# Altium PCB PCB4.PcbDoc
Units mm, origin at the board's own origin, x right, y up, seen from the top; angles counter-clockwise.
Board outline 90 x 120 mm, 2 copper layers (Top Layer, Bottom Layer); 37 components, 42 nets, 192 pads, 54 vias.
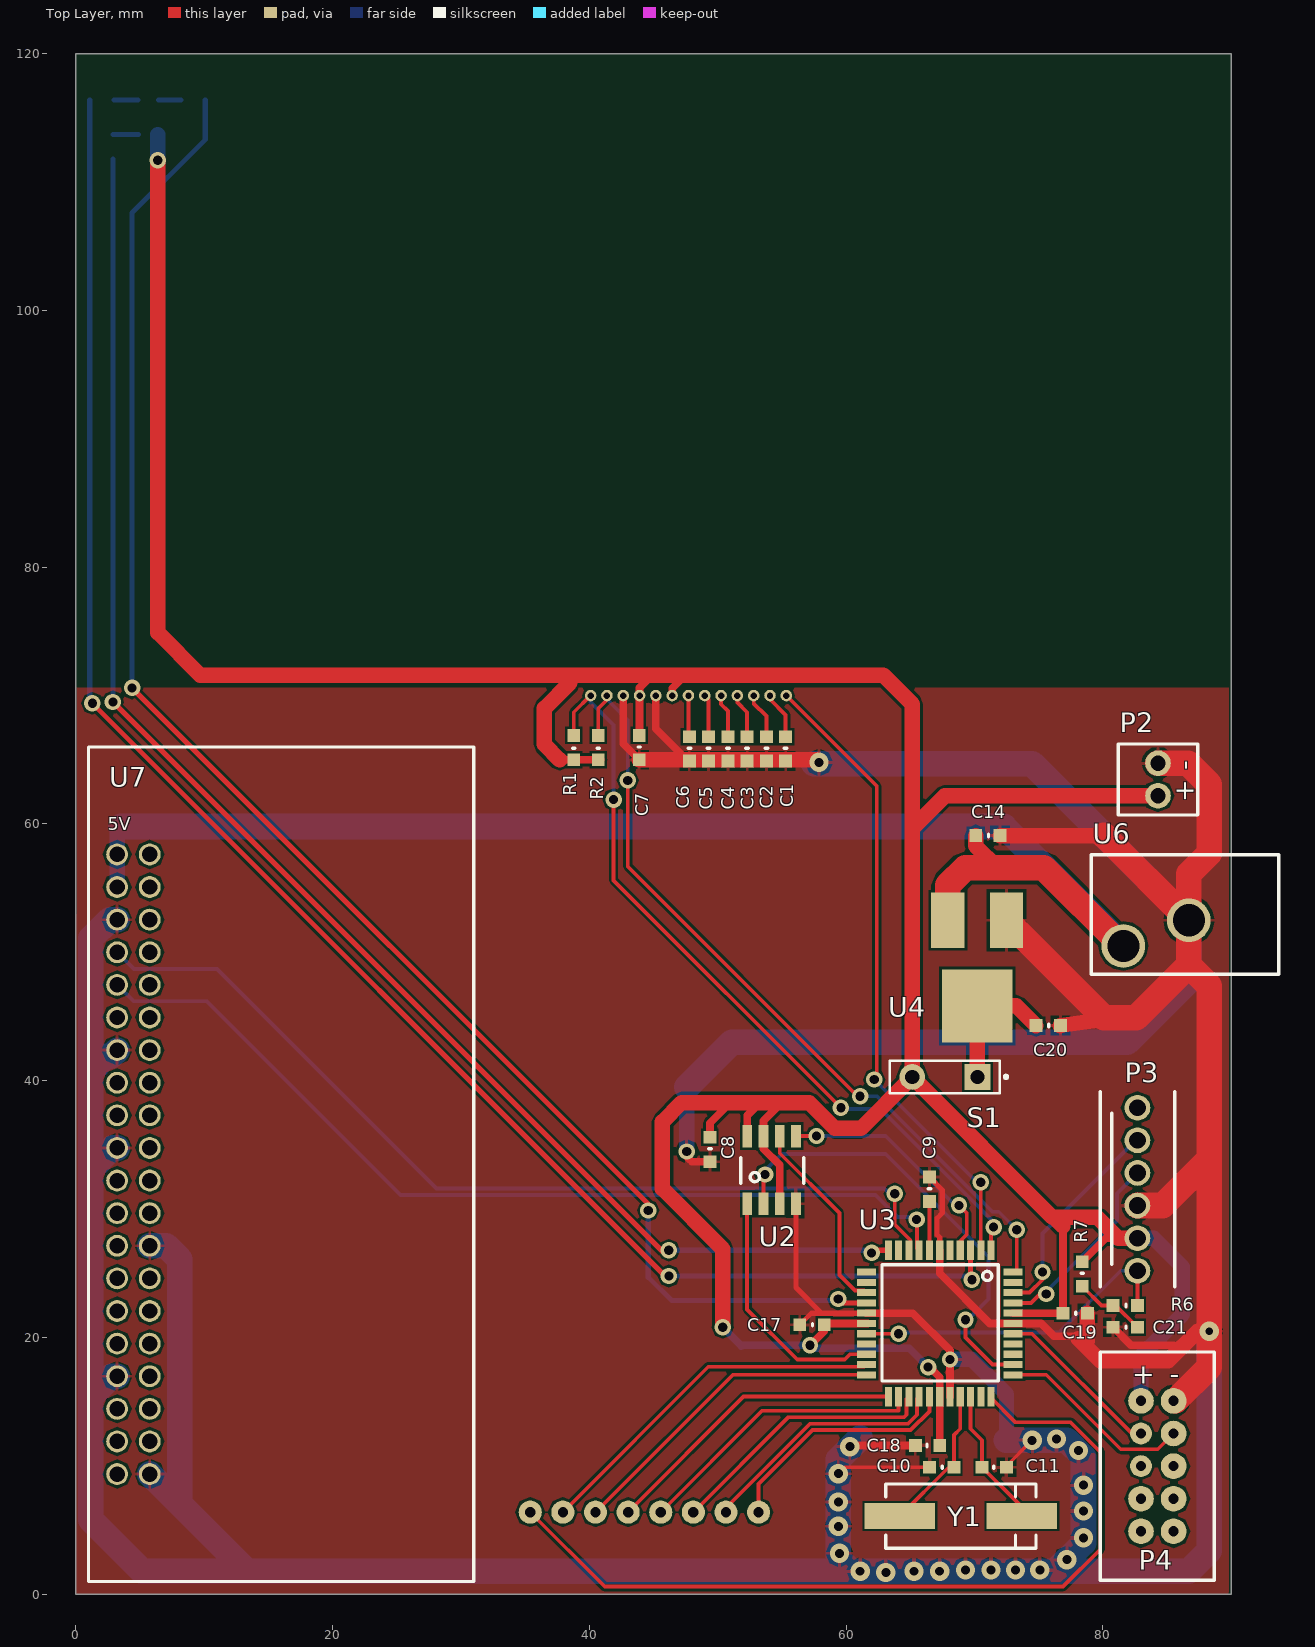
[diagram p0: Top Layer view]
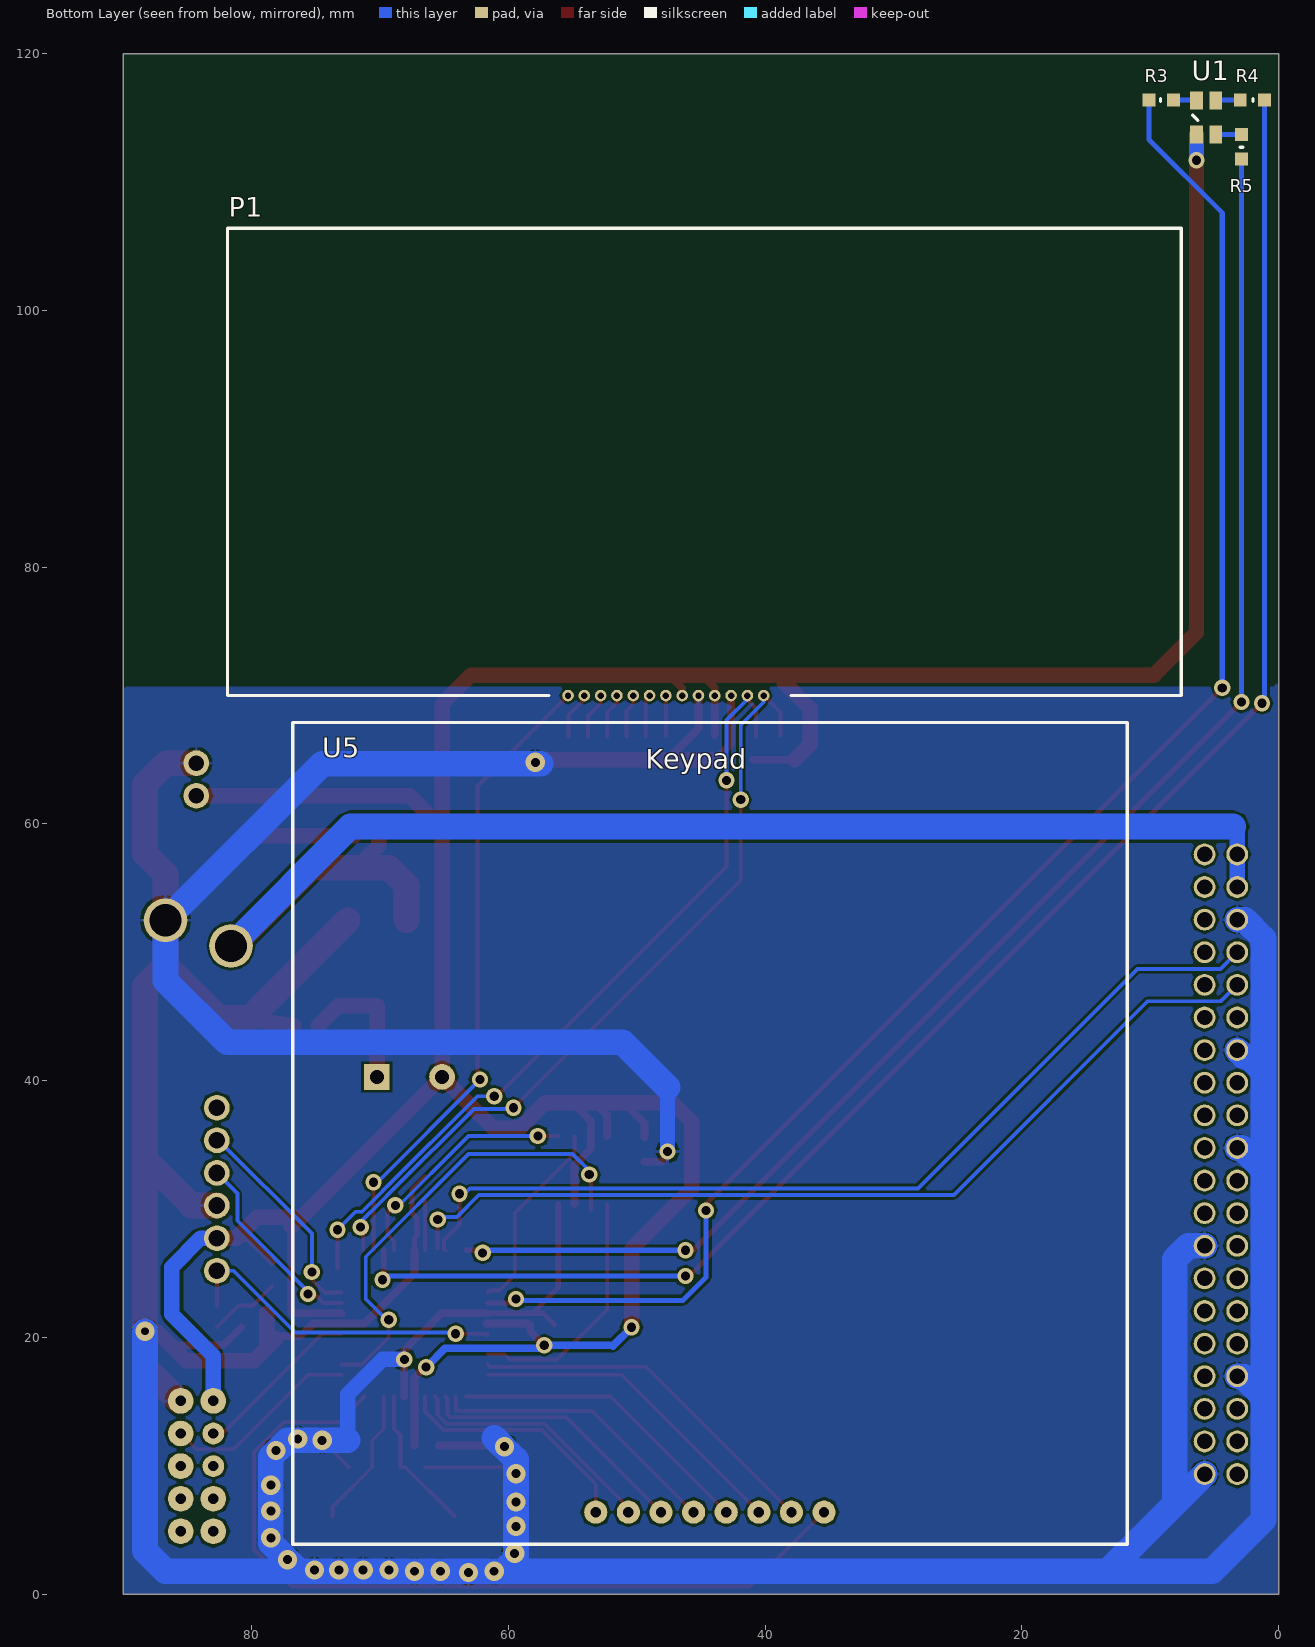
[diagram p1: Bottom Layer view, seen from below]

## Layer stack, top to bottom
Top Solder: solder mask 0.0102, Solder Resist, Dk 3.5
Top Layer: signal copper 0.0356
Dielectric 1: dielectric 0.32, FR-4, Dk 4.8
Bottom Layer: signal copper 0.0356
Bottom Solder: solder mask 0.0102, Solder Resist, Dk 3.5

## Board outline
0,0 90,0 90,120 0,120

## Design rules (kind name [scope] priority, off if disabled: settings)
Clearance [All] p1: gap=0.2
HoleSize [All] p1: absolutevalues=TRUE maxlimit=4 minlimit=0.3 maxpercent=80.000 minpercent=20.000
MinimumSolderMaskSliver [All] p1: minsoldermaskwidth=0
PolygonConnect [All] p1: connectstyle=Relief reliefconductorwidth=0.254 reliefentries=4 polygonreliefangle="90 Angle" airgapwidth=0.254
RoutingVias [All] p1: holewidth=0.711 width=1.27 viastyle="Through Hole" minholewidth=0.3 minwidth=0.7 maxholewidth=3 maxwidth=4
SilkToSilkClearance [All] p1: silktosilkclearance=0.1
SilkToSolderMaskClearance [IsPad] p1: minsilkscreentomaskgap=0.1 clearancetoexposedcopper=TRUE
SolderMaskExpansion [All] p1: expansion=0.102
UnpouredPolygon [All] p1: allowunpoured=FALSE
Width [All] p1: maxlimit=4 minlimit=0.2 preferedwidth=0.254
25 further rules are at their usual default settings.

## Classes and differential pairs
component class RFID: P4
component class "Raspberry Pi": U7
component class PIC: C9 C10 C11 C14 C17 C18 C19 C20 C21 P3 R6 R7 S1 U3 U4 U6 Y1
component class Led: R3 R4 R5 U1
component class LCD: C1 C2 C3 C4 C5 C6 C7 P1 P2 R1 R2
component class Flash: C8 U2
component class Clavier: U5

## Components (designator, comment, footprint, x,y, rotation, side; value= is the part's Value field where it differs from the comment)
C1 "Cap" 0603 55.3,64.9 r90 top
C2 "Cap" 0603 53.8,64.9 r90 top
C3 "Cap" 0603 52.3,64.9 r90 top
C4 "Cap" 0603 50.8,64.9 r90 top
C5 "Cap" 0603 49.3,64.9 r90 top
C6 "Cap" 0603 47.8,64.9 r90 top
C7 "Cap" 0603 43.9,65 r90 top
C8 "Cap" 0603 49.4,33.7 r90 top
C9 "Cap" 0603 66.5,30.6 r90 top
C10 "Cap" 0603 66.5,9.9 r0 top
C11 "Cap" 0603 72.5,9.9 r180 top
C14 "Cap Pol1" 0603 70.1,59.1 r0 top
C17 "Cap" 0603 56.4,21 r0 top
C18 "Cap" 0603 67.3,11.6 r180 top
C19 "Cap" 0603 76.9,21.9 r0 top
C20 "Cap Pol1" 0603 74.8,44.3 r0 top
C21 "Cap" 0603 80.8,20.8 r0 top
P1 "LCD" lcd 81.88,70 r180 bottom
P2 "lcd backlight" "lcd bk" 84.3,62.2 r90 top
P3 "ISCP" ISCP 82.7,25.2 r90 top
P4 "UEXT connector" "Conneteur UEXT" 79.8,1.1 r0 top
R1 "Res2" 0603 38.8,66.9 r270 top
R2 "Res2" 0603 40.7,66.9 r270 top
R3 "Res2" 0603 8.2,116.4 r0 bottom
R4 "Res2" 0603 3,116.4 r180 bottom
R5 "Res2" 0603 2.9,113.7 r270 bottom
R6 "Res2" 0603 80.8,22.5 r0 top
R7 "Res2" 0603 78.4,24 r90 top
S1 "SW-SPST" SPST-2 67.7,40.3 r180 top
U1 "ledRGB" "LED RGB" 6.4,113.7 r180 bottom
U2 "Flash" flash 52.3,31 r0 top
U3 "PIC32_1" PIC32 73,25.1 r270 top
U4 "regulateur" regulateur 72.5,52.5 r180 top
U5 "clavier" keypad 76.8,3.9 r180 bottom
U6 "alim" Alim 79.1,48.3 r270 top
U7 "Raspberry_pi_zero_w" RASPB 1,1 r0 top
Y1 "Quartz 8MHz" quartz 73.7,6.1 r180 top

## Footprints (in the part's own frame and the unit in brackets; to place one, negate y for a bottom-side part, rotate by r counter-clockwise, add the part's x,y. Pads: shape width x height; smd on the part's side, far side on the other; paste and mask are expansions set on the pad)
0603 [mm]
  rect 1x1 smd: 1(0,0) 2(1.9,0)
  silkscreen extent 1,-0.1 1,0.1
Alim [mm]
  round 3.4 hole 2.5: 1(-2.2,2.5) 2(-4.2,7.6)
  silkscreen extent -9.3,0 0,14.6
"Conneteur UEXT" [mm]
  round 2 hole 0.8: 1(3.175,13.97) 2(5.715,13.97) 4(5.715,11.43) 6(5.715,8.89) 7(3.175,6.35) 8(5.715,6.35) 9(3.175,3.81) 10(5.715,3.81)
  round 1.7 hole 0.8: 3(3.175,11.43) 5(3.175,8.89)
  silkscreen extent 0,0 8.89,17.78
flash [mm]
  rect 0.76x1.78 smd: 1(0,-0.572) 2(1.27,-0.572) 4(3.81,-0.572) 5(3.81,4.68) 6(2.54,4.68) 7(1.27,4.68) 8(0,4.68)
  rect 0.72x1.78 smd: 3(2.54,-0.572)
  silkscreen extent -0.5,1 4.4,3
ISCP [mm]
  round 2 hole 1.3: GND(5.08,0) PGC(10.16,0) PGD(7.62,0) PGM(12.7,0) RST(0,0) VCC(2.54,0)
  silkscreen extent -1.27,-2.9 13.97,2.9
keypad [mm]
  round 1.8 hole 0.8: 1(23.61,2.5) 2(26.15,2.5) 3(28.69,2.5) 4(31.23,2.5) 5(33.77,2.5) 6(36.31,2.5) 7(38.85,2.5) 8(41.39,2.5)
  silkscreen extent 0,0 65,64
lcd [mm]
  round 0.9 hole 0.5: 1(26.53,0) 2(27.8,0) 3(29.07,0) 4(30.34,0) 5(31.61,0) 6(32.88,0) 7(34.15,0) 8(35.42,0) 9(36.69,0) 10(37.96,0) 11(39.23,0) 12(40.5,0) 13(41.77,0)
  silkscreen extent 0,0 74.3,36.4
"lcd bk" [mm]
  round 2 hole 1.2: 1(0,0) 2(2.54,0)
  silkscreen extent -1.5,-3.1 4.04,3.1
"LED RGB" [mm]
  rect 1x1.4 smd: 1(0,0) 2(0,2.64) 3(1.5,2.64) 4(1.5,0)
  silkscreen extent -0.3,1.1 0.1,1.5
PIC32 [mm]
  rect 1.5x0.55 smd: 1(-1.7,-1.7) 2(-1.7,-2.5) 3(-1.7,-3.3) 4(-1.7,-4.1) 5(-1.7,-4.9) 6(-1.7,-5.7) 7(-1.7,-6.5) 8(-1.7,-7.3) 9(-1.7,-8.1) 10(-1.7,-8.9) 11(-1.7,-9.7) 23(9.7,-9.7) 24(9.7,-8.9) 25(9.7,-8.1) 26(9.7,-7.3) 27(9.7,-6.5) 28(9.7,-5.7) 29(9.7,-4.9) 30(9.7,-4.1) 31(9.7,-3.3) 32(9.7,-2.5) 33(9.7,-1.7)
  rect 0.55x1.5 smd: 12(0,-11.4) 13(0.8,-11.4) 14(1.6,-11.4) 15(2.4,-11.4) 16(3.2,-11.4) 17(4,-11.4) 18(4.8,-11.4) 19(5.6,-11.4) 20(6.4,-11.4) 21(7.2,-11.4) 22(8,-11.4) 34(8,0) 35(7.2,0) 36(6.4,0) 37(5.6,0.013) 38(4.8,0) 39(4,0) 40(3.2,0) 41(2.4,0) 42(1.6,0) 43(0.8,0) 44(0,0)
  silkscreen extent -0.56,-10.19 8.49,-1.14
quartz [mm]
  rect 5.5x2 smd: 1(0,0) 2(9.5,0)
  silkscreen extent -1.1,-2.5 10.6,2.5
RASPB [mm]
  round 1.7 hole 1.2: 1(4.77,56.63) 2(2.23,56.63) 3(4.77,54.09) 4(2.23,54.09) 5(4.77,51.55) 6(2.23,51.55) 7(4.77,49.01) 8(2.23,49.01) 9(4.77,46.47) 10(2.23,46.47) 11(4.77,43.93) 12(2.23,43.93) 13(4.77,41.39) 14(2.23,41.39) 15(4.77,38.85) 16(2.23,38.85) 17(4.77,36.31) 18(2.23,36.31) 19(4.77,33.77) 20(2.23,33.77) 21(4.77,31.23) 22(2.23,31.23) 23(4.77,28.69) 24(2.23,28.69) 25(4.77,26.15) 26(2.23,26.15) 27(4.77,23.61) 28(2.23,23.61) 29(4.77,21.07) 30(2.23,21.07) 31(4.77,18.53) 32(2.23,18.53) 33(4.77,15.99) 34(2.23,15.99) 35(4.77,13.45) 36(2.23,13.45) 37(4.77,10.91) 38(2.23,10.91) 39(4.77,8.37) 40(2.23,8.37)
  silkscreen extent 0,0 30,65
regulateur [mm]
  rect 2.6x4.3 smd: 1(0,0) 3(4.57,0)
  rect 5.5x5.7 smd: 4(2.285,6.665)
SPST-2 [mm] "Switch; 2 Leads"
  rect 2x2 hole 1.1: 1(-2.54,0)
  round 2 hole 1.1: 2(2.54,0)
  silkscreen extent -4.89,-1.27 4.28,1.27

## Part data
C1 C2 C3 C4 C5 C6 C7 C8 C9 C10 C11 C17 C18 C19 C21: "Capacitor"
C14 C20: "Polarized Capacitor (Radial)"
P1: library part "Header 13", "LCD Connector"
P2: library part "Header 2H", "Header, 2-Pin, Right Angle"
R1 R2 R3 R4 R5 R6 R7: "Resistor"
S1: "Single-Pole, Single-Throw Switch"
Y1: library part XTAL, "Crystal Oscillator"

## Via types
v1: diameter 1.27, hole 0.711, Top Layer to Bottom Layer, 32 vias
v2: diameter 1.5, hole 0.7, Top Layer to Bottom Layer, 21 vias
v3: diameter 1.5, hole 0.6, Top Layer to Bottom Layer, 1 vias

## Nets (pads, with @x,y where several pads share a name; then routed paths per layer and width w, separated by ;. In a path a pad name is that pad's centre, name@x,y a point inside that pad or via, vN(x,y) a via of type N, cw(c..) or ccw(c..) an arc to the next point about the centre after c; other vN are vias at no path point)
3.3V: C7.2 C8.2 C17.2 C18.1 C19.1 P1.8 P1.10 P2.1 P3.VCC P4.1 R1.2 R2.2 R7.2 S1.2 U1.1 U2.3 U2.7 U2.8 U3.17 U3.28 U3.40 | length 305.3
  Top Layer w0.6: 37.7,65 R2.2@40.9,65 ; C7.2@43.92,66.92 P1.10 43.92,70.62 44.7,71.4 ; P1.8 46.46,70.56 47.4,71.5 ; C8.2 49.4,36.7 51,38.3 ; U2.8 52.3,37.3 53.3,38.3 ; U2.3 54.84,33.441 53.57,34.711 U2.7 53.57,36.87 55,38.3 ; v1(57.2,19.4) 58.3,20.5 C17.2 ; C17.2@58.5,21.1 U3.17@61.7,21.1 ; v1(66.4,17.7) 66.5,17.7 67.3,16.9 U3.28 C18.1 ; U3.40 C19.1 76.9,28.66 ; R7.2 80.24,27.74 81.2,27.74
  Top Layer w1.2: v1(6.4,111.7) 6.4,74.9 9.7,71.6 62.9,71.6 65.16,69.34 65.16,59.66 ; 37.7,65 36.5,66.2 36.5,69 38.5,71 ; v1(50.4,20.8) 50.4,26.9 45.7,31.6 45.7,36.8 47.2,38.3 51,38.3 53.3,38.3 55,38.3 57.129,38.3 59.129,36.3 61.16,36.3 S1.2 ; 76.1,29.36 S1.2 ; 76.9,28.66 76.2,29.36 79.58,29.36 81.2,27.74 P3.VCC ; P2.1 67.7,62.2 65.16,59.66 ; S1.2 65.16,59.66
  Bottom Layer w0.6: v1(50.4,20.8) 51.85,19.35 ; 51.9,19.4 v1(57.2,19.4) 57.435,19.165 64.935,19.165 v1(66.4,17.7)
  Bottom Layer w1.2: v1(6.4,111.7) U1.1 ; P3.VCC 83.96,27.74 86.2,25.5 86.2,21.8 82.975,18.575 P4.1
5V: C14.1 U4.3 U6.1 U7.2 U7.4 | length 109.5
  Top Layer w0.254: U6.1@81.5,50.5 U6.1
  Top Layer w1.2: C14.1 70.1,58.3 71.8,56.6 71.9,56.5
  Top Layer w2: U4.3 67.93,55.23 69.3,56.6 71.8,56.6 75.4,56.6 U6.1@81.5,50.5
  Bottom Layer w1.2: U7.4 3.23,59.85
  Bottom Layer w2: 3.53,59.8 72.3,59.8 U6.1
GND: C1.1 C2.1 C3.1 C4.1 C5.1 C6.1 C7.1 C8.1 C9.2 C10.1 C11.1 C14.2 C17.1 C18.2 C19.2 C20.2 C21.1 P1.9 P1.11 P2.2 P3.GND P4.2 U2.4 U3.6 U3.16 U3.29 U3.39 U4.1 U6.2 U7.6 U7.14 U7.20 U7.25 U7.34 U7.39 | length 531.8
  Top Layer w0.3: v2(59.4,9.4) 59.9,9.9 C10.1 ; C11.1 72.4,9.9 v2(74.5,12)
  Top Layer w0.4: U2.4 56.11,23.89 58.1,21.9 ; C17.1 57.3,21.9 U3.16 ; C9.2 67.5,31.5 67.5,29.7 67.1,29.3 67.1,28 67.3,27.8 U3.6
  Top Layer w0.6: P1.11 42.65,66.25 C7.1 ; P1.9 45.19,67.41 47.6,65 47.7,64.9 C6.1 ; v1(47.6,34.5) 47.6,34.1 48,33.7 C8.1 ; v2@60.3,11.6 C18.2 ; U3.16 65.2,21.9 68.1,19 U3.29 ; U3.6 67.3,25 71.2,21.1 U3.39 75.2,21.1 76.2,20.1 78.1,20.1 ; C21.1 82.2,19.4 85.5,19.4
  Top Layer w1.2: C7.1 C6.1@47.6,65 ; C6.1@47.8,65 57.7,65 v2(57.9,64.8) ; C14.2 80.1,59.1 ; C20.2 81,44.9 ; 78.1,19.9 79.8,18.2 85.1,18.2 87.4,20.5 v3(88.3,20.5) ; 78.8,19.7 C19.2
  Top Layer w2: U4.1 80.1,44.9 81,44.9 82.6,44.9 86.7,49 ; 80.1,59.1 U6.2 ; P3.GND 84.68,30.28 88.3,33.9 ; P2.2 86.66,64.74 88.3,63.1 88.3,57.7 86.7,56.1 U6.2 ; P4.2@85.67,15.07 88.3,17.7 v3(88.3,20.5) 88.3,33.9 ; 86.7,49 88.3,47.4 88.3,33.9 ; 86.7,49 U6.2
  Bottom Layer w1.2: v1(47.6,34.5) 47.6,39.5 ; v1(68.1,18.3) 69.8,18.3 72.5,15.6 72.5,12
  Bottom Layer w2: 1.18,15.38 2.79,16.99 U7.34 ; U7.20 2.871,34.77 1.18,33.079 ; U7.14 2.74,41.9 2.381,41.9 1.67,41.19 1.18,41.68 ; U7.6 2.65,52.55 1.18,51.08 1.18,41.68 ; U7.39 8.1,7.04 ; U7.25 7.05,27.15 8.1,26.1 8.1,7.04 ; 47.6,39.5 51.1,43 81.9,43 86.7,47.8 U6.2 74.5,64.7 v2@57.5,64.7 ; 61.1,12.2 59.4,10.5 59.4,2.8 v2@60.4,1.8 ; 72.5,12 v2(74.5,12) 77.2,12 78.5,10.7 78.5,4 76.3,1.8 ; v3(88.3,20.5) 88.3,3.4 86.7,1.8 76.3,1.8 ; 1.18,33.079 1.18,5.82 5.2,1.8 13.34,1.8 ; 1.18,33.079 1.18,41.68 ; 8.1,7.04 13.34,1.8 ; 13.34,1.8 v2@60.4,1.8 ; v2@60.4,1.8 76.3,1.8
  other v2: 63.1,1.7 61.1,1.8 65.3,1.8 67.3,1.8 69.3,1.9 71.3,1.9 73.2,1.9 75.1,1.9 77.2,2.7 59.5,3.2 78.5,4.4 59.4,5.3 78.5,6.5 59.4,7.2 78.5,8.5 78.1,11.2 60.3,11.5 76.4,12.1
MCLR: P3.RST R6.2 U3.18 | length 26.3
  Top Layer w0.3: U3.18 61.7,20.2 61.8,20.3 v1(64.1,20.3) ; R6.2 P3.RST
  Bottom Layer w0.3: v1(64.1,20.3) 64.1,20.6 64.3,20.4 76.6,20.4 81.4,25.2 P3.RST
NetC1_2: C1.2 P1.2 | length 3.7
  Top Layer w0.3: P1.2 54.08,69.72 55.3,68.5 C1.2
NetC2_2: C2.2 P1.3 | length 3.6
  Top Layer w0.3: P1.3 52.81,69.39 53.8,68.4 C2.2
NetC3_2: C3.2 P1.4 | length 3.5
  Top Layer w0.3: P1.4 51.54,69.46 52.3,68.7 C3.2
NetC4_2: C4.2 P1.5 | length 3.4
  Top Layer w0.3: P1.5 50.27,69.33 50.8,68.8 C4.2
NetC5_2: C5.2 P1.6 | length 3.3
  Top Layer w0.3: P1.6 49.3,69.7 C5.2
NetC6_2: C6.2 P1.7 | length 3.1
  Top Layer w0.3: C6.2@47.73,66.87 P1.7
NetC9_1: C9.1 U3.7 | length 3.8
  Top Layer w0.3: U3.7 C9.1
NetC20_1: C20.1 S1.1 U4.4 | length 10.7
  Top Layer w1.2: S1.1@70.215,40.325 U4.4 73.265,45.835 C20.1
NetC21_2: C21.2 R6.1 R7.1 | length 5.6
  Top Layer w0.3: R7.1 79.9,22.5 R6.1 81,22.5 C21.2
NetP1_1: P1.1 U3.2 | length 50.2
  Top Layer w0.3: P1.1 62.4,62.95 62.4,39.9 v1(62.2,40.1) ; U3.2 v1(70.5,32.1)
  Bottom Layer w0.3: v1(62.2,40.1) 70.2,32.1 v1(70.5,32.1)
NetP1_12: P1.12 R2.1 U3.44 | length 62.5
  Top Layer w0.3: R2.1@40.7,66.807 R2.1 40.7,69 41.38,69.68 P1.12 ; v1(43,63.4) 43,56.7 60.871,38.829 v1(61.1,38.8) ; 73.3,25.4 v1(73.3,28.4)
  Bottom Layer w0.3: P1.12 41.38,69.72 43,68.1 v1(43,63.4) ; v1(61.1,38.8) 62.407,38.8 69.515,31.692 70.092,31.115 71.407,29.8 71.9,29.8 v1(73.3,28.4)
NetP1_13: P1.13 R1.1 U3.1 | length 61.8
  Top Layer w0.3: R1.1 38.8,68.7 40.1,70 P1.13 ; v1(41.9,61.9) 41.9,55.6 v1(59.6,37.9) ; U3.1 71.3,28.4 v1(71.5,28.6)
  Bottom Layer w0.3: P1.13 40.11,69.49 41.9,67.7 v1(41.9,61.9) ; v1(59.6,37.9) 59.685,37.815 62.685,37.815 69.015,31.485 69.885,30.615 ; 69.885,30.615 71.5,29 v1(71.5,28.6) v1@71.4,28.7
NetP4_3: P4.3 U3.38 | length 13.2
  Top Layer w0.3: U3.38 74.5,20.3 82.27,12.53 P4.3
NetP4_4: P4.4 U3.34 | length 15.4
  Top Layer w0.3: U3.34 75.6,17.1 81.4,11.3 84.285,11.3 P4.4
NetR3_1: R3.1 U1.2 | length 1.7
  Bottom Layer w0.4: U1.2@6.46,116.4 R3.1
NetR3_2: R3.2 U3.15 | length 128.7
  Top Layer w0.4: v1(4.4,70.6) 44.7,30.3 44.6,30.2 v1(44.6,29.9) ; v1(59.4,23) 59.7,22.7 U3.15
  Bottom Layer w0.4: v1(4.4,70.6) 4.4,107.6 10.1,113.3 R3.2 ; v1(44.6,29.9) 44.6,24.7 46.4,22.9 59.3,22.9 v1(59.4,23)
NetR4_1: R4.1 U1.3 | length 1.8
  Bottom Layer w0.4: R4.1 U1.3@4.84,116.4
NetR4_2: R4.2 U3.3 | length 136.2
  Top Layer w0.4: v1(1.3,69.4) 45.9,24.8 v1(46.2,24.8) ; U3.3 69.7,24.6 v1(69.8,24.5)
  Bottom Layer w0.4: v1@1.1,69.6 R4.2 ; v1(46.2,24.8) 69.5,24.8 v1(69.8,24.5)
NetR5_1: R5.1 U1.4 | length 2
  Bottom Layer w0.4: R5.1 U1.4
NetR5_2: R5.2 U3.11 | length 120.7
  Top Layer w0.4: v1(2.9,69.5) 45.7,26.7 45.8,26.8 v1(46.2,26.8) ; v1(62,26.6) 62.2,26.8 U3.11
  Bottom Layer w0.4: v1(2.9,69.5) R5.2 ; v1(46.2,26.8) 61.6,26.8 61.7,26.7 61.8,26.8 v1(62,26.6)
NetU2_1: U2.1 U3.20 | length 19.3
  Top Layer w0.3: U2.1 52.3,22.2 56.2,18.3 59.9,18.3 60.3,18.7 U3.20
NetU2_2: U2.2 U3.35 | length 36.5
  Top Layer w0.3: U2.2@53.57,29.953 U2.2 53.57,32.87 53.7,32.74 v1(53.7,32.7) ; v1(69.31,21.385) 69.31,20.01 71.42,17.9 U3.35
  Bottom Layer w0.3: v1(53.7,32.7) 53.7,33 55,34.3 63.1,34.3 71.1,26.3 71.1,23.005 69.395,21.3 v1(69.31,21.385)
NetU2_5: U2.5 U3.4 | length 19.3
  Top Layer w0.3: U2.5 56.13,35.7 v1(57.7,35.7) ; v1(68.8,30.3) 69.4,29.7 69.4,28.02 68.9,27.52 U3.4
  Bottom Layer w0.3: v1(57.7,35.7) 63.1,35.7 v1@69,29.8
NetU2_6: U2.6 U3.14 | length 15.4
  Top Layer w0.3: U2.6 54.84,34.36 59.5,29.7 59.5,24.88 60.705,23.675 61.425,23.675 U3.14
NetU3_8: U3.8 U7.10 | length 72.1
  Top Layer w0.3: v1(65.5,29.2) 65.525,29.175 U3.8@65.525,26.975
  Bottom Layer w0.3: U7.10 4.5,46.2 10.197,46.2 25.297,31.1 62.3,31.1 64,29.4 65.3,29.4 v1(65.5,29.2)
NetU3_9: U3.9 U7.8 | length 73.3
  Top Layer w0.3: v1(63.8,31.2) 63.8,31.1 63.8,28.8 65,27.6 65,26.9 U3.9
  Bottom Layer w0.3: U7.8 4.54,48.7 11,48.7 28.1,31.6 63,31.6 63.4,31.2 v1(63.8,31.2)
NetU3_21: U3.21 U5.7 | length 28.4
  Top Layer w0.3: U5.7 49.275,17.725 61.425,17.725 U3.21
NetU3_22: U3.22 U5.6 | length 25.5
  Top Layer w0.3: U5.6 51.19,17.1 U3.22
NetU3_23: U3.23 U5.5 | length 24
  Top Layer w0.3: U5.5 52.03,15.4 U3.23
NetU3_24: U3.24 U5.4 | length 22.9
  Top Layer w0.3: U5.4 53.47,14.3 64.1,14.3 U3.24
NetU3_25: U3.25 U5.3 | length 21.2
  Top Layer w0.3: U5.3 55.51,13.8 64.537,13.8 64.725,13.988 64.725,15.225 U3.25
NetU3_26: U3.26 U5.2 | length 19.7
  Top Layer w0.3: U5.2 50.65,6.75 57.191,13.291 64.829,13.291 65.525,13.988 65.525,15.225 U3.26
NetU3_27: U3.27 U5.1 | length 19
  Top Layer w0.3: U5.1 53.19,8.583 57.399,12.791 65.036,12.791 66.5,14.256 U3.27
NetU3_33: U3.33 U5.8 | length 66.1
  Top Layer w0.3: U5.8 41.21,0.6 76.9,0.6 79.8,3.5 79.8,11.1 77.5,13.4 73.2,13.4 71.2,15.4 U3.33
PGEC3: P3.PGC U3.42 | length 16.7
  Top Layer w0.3: U3.42 74.3,23.5 75.3,24.5 v1(75.3,25.1)
  Bottom Layer w0.3: v1(75.3,25.1) 75.3,28.1 82.56,35.36 P3.PGC
PGED3: P3.PGD U3.41 | length 15.3
  Top Layer w0.3: U3.41 74.4,22.7 75.1,23.4 v1(75.6,23.4)
  Bottom Layer w0.3: v1(75.6,23.4) 75.6,23.6 81.1,29.1 81.1,31.22 P3.PGD
X1: C10.2 U3.30 Y1.2 | length 11.5
  Top Layer w0.3: Y1.2 68,9.9 C10.2 68.4,12.4 68.9,12.9 U3.30
X2: C11.2 U3.31 Y1.1 | length 11
  Top Layer w0.3: U3.31 69.7,12.9 70.6,12 C11.2 73.7,6.8 Y1.1
pads on no net: P3.PGM P4.5 P4.6 P4.7 P4.8 P4.9 P4.10 U3.5 U3.10 U3.12 U3.13 U3.19 U3.32 U3.36 U3.37 U3.43 U7.1 U7.3 U7.5 U7.7 U7.9 U7.11 U7.12 U7.13 U7.15 U7.16 U7.17 U7.18 U7.19 U7.21 U7.22 U7.23 U7.24 U7.26 U7.27 U7.28 U7.29 U7.30 U7.31 U7.32 U7.33 U7.35 U7.36 U7.37 U7.38 U7.40

## Polygon pours and split planes (outlines as drawn)
GND on Bottom Layer "Bottom Layer-No Net" (solid, pour order 4): 0,71.1 0.4,70.7 89.9,70.7 89.9,0.1 90,0 0,0 0,70.7
GND on Top Layer "Bottom Layer-No Net" (solid, pour order 6): 0.1,70.6 89.8,70.6 89.8,0.2 90,0 0,0

## Silkscreen, mask and mechanical layers (free items; w line width, h text height)
Top Solder:
  text "Crypto Transfer" at 16.6,112.1 h10
  text "Ξasy, Fast & Secured" at 13.6,103.9 h8
  text "E. Merabet" at 25.9,96 h4
  text "A. Calleja" at 26.1,89.5 h4
  text "L. Fujimoto" at 26.2,83.3 h4
  text "J. Murte" at 26.1,77 h4
Mechanical 1:
  lines w0.254: -4.804,1.525 -4.3,0 ; -4.554,0.001 -4.046,-0.001 ; -4.512,118.477 -4,120 ; -4.254,120.001 -3.746,119.999 ; -4.164,54.261 -4.3,0 ; -4.136,65.739 -4,120 ; -3.788,1.523 -4.3,0 ; -3.496,118.475 -4,120 ; -0.003,-3.592 0,-4.1 ; 1.52,-3.33 -0.001,-3.846 ; 1.525,-4.346 -0.001,-3.846 ; 37.102,-3.64 -0.001,-3.846 ; 52.895,-3.552 89.999,-3.346 ; 88.472,-2.846 89.999,-3.346 ; 88.477,-3.862 89.999,-3.346 ; 89.997,-3.092 90,-3.6
  text "120 (mm)" at -3.25,54.513 h1.52 r89.86
  text "90.001 (mm)" at 37.361,-4.553 h1.52 r0.32
Mechanical 2:
  lines w0.254: 0,0 0,120 90,120 ; 0.1,0.1 90,0.1 ; 90,0 90,120 ; 90,120 90,120
Mechanical 3:
  lines w1.2: -0.6,0 ccw(c0,0) 0,-0.6 ; -0.6,0 ccw(c0,0) 0,-0.6 ; -0.6,0 -0.6,120 ; -0.6,120 cw(c0,120) 0,120.6 ; -0.6,120 cw(c0,120) 0,120.6 ; 0,-0.6 90,-0.6 ; 0,120.6 90,120.6 ; 90,-0.6 ccw(c90,0) 90.6,0 ; 90,-0.6 ccw(c90,0) 90.6,0 ; 90,120.6 cw(c90,120) 90.6,120 ; 90,120.6 cw(c90,120) 90.6,120 ; 90.6,0 90.6,120
Drill Drawing:
  circle w0.254: c106.565,95.118 r0.635
  lines w0.254: 105.93,83.37 106.248,83.37 106.565,83.053 106.883,83.37 107.2,83.37 106.883,83.688 107.2,84.005 106.883,84.005 106.565,84.323 106.248,84.005 105.93,84.005 106.248,83.688 105.93,83.37 ; 105.93,86.863 107.2,86.863 107.2,88.133 105.93,88.133 105.93,86.863 ; 105.93,91.308 106.565,90.673 107.2,91.308 106.565,91.943 105.93,91.308 ; 105.93,98.293 107.2,98.293 107.2,99.563 105.93,99.563 105.93,98.293 ; 105.93,102.103 106.565,102.42 107.2,102.103 106.883,102.738 107.2,103.373 106.565,103.055 105.93,103.373 106.248,102.738 105.93,102.103 ; 105.93,106.23 106.248,106.23 106.248,105.913 106.883,105.913 106.883,106.23 107.2,106.23 107.2,106.865 106.883,106.865 106.883,107.183 106.248,107.183 106.248,106.865 105.93,106.865 105.93,106.23 ; 105.93,110.993 107.2,110.993 106.565,109.723 105.93,110.993 ; 105.93,113.533 105.93,113.85 106.248,114.168 105.93,114.485 105.93,114.803 106.248,114.803 106.565,114.485 106.883,114.803 107.2,114.803 107.2,114.485 106.883,114.168 107.2,113.85 107.2,113.533 106.883,113.533 106.565,113.85 106.248,113.533 105.93,113.533 ; 106.184,87.117 106.946,87.117 106.946,87.879 106.184,87.879 106.184,87.117
  lines w0.381: 104.2,81.91 202.726,81.91 ; 104.2,116.2 202.726,116.2 ; 118.192,78.1 118.192,120.01 ; 135.917,78.1 135.917,120.01 ; 170.095,78.1 170.095,120.01 ; 182.944,78.1 182.944,120.01 ; 104.2,78.1 202.726,78.1 202.726,120.01 104.2,120.01 104.2,78.1
  text "Symbol" at 106.486,117.343 h1.83
  text "Hit Count" at 119.335,117.343 h1.83
  text "Finished Hole Size" at 137.06,117.343 h1.83
  text "Plated" at 171.238,117.343 h1.83
  text "Hole Type" at 184.087,117.343 h1.83
  text "1" at 119.335,113.533 h1.52
  text "0.600mm (23.62mil)" at 137.06,113.533 h1.52
  text "PTH" at 171.238,113.533 h1.52
  text "Round" at 184.087,113.533 h1.52
  text "2" at 119.335,109.723 h1.52
  text "1.100mm (43.31mil)" at 137.06,109.723 h1.52
  text "PTH" at 171.238,109.723 h1.52
  text "Round" at 184.087,109.723 h1.52
  text "2" at 119.335,105.913 h1.52
  text "2.500mm (98.43mil)" at 137.06,105.913 h1.52
  text "PTH" at 171.238,105.913 h1.52
  text "Round" at 184.087,105.913 h1.52
  text "6" at 119.335,102.103 h1.52
  text "1.300mm (51.18mil)" at 137.06,102.103 h1.52
  text "PTH" at 171.238,102.103 h1.52
  text "Round" at 184.087,102.103 h1.52
  text "13" at 119.335,98.293 h1.52
  text "0.500mm (19.69mil)" at 137.06,98.293 h1.52
  text "PTH" at 171.238,98.293 h1.52
  text "Round" at 184.087,98.293 h1.52
  text "18" at 119.335,94.483 h1.52
  text "0.800mm (31.50mil)" at 137.06,94.483 h1.52
  text "PTH" at 171.238,94.483 h1.52
  text "Round" at 184.087,94.483 h1.52
  text "21" at 119.335,90.673 h1.52
  text "0.700mm (27.56mil)" at 137.06,90.673 h1.52
  text "PTH" at 171.238,90.673 h1.52
  text "Round" at 184.087,90.673 h1.52
  text "32" at 119.335,86.863 h1.52
  text "0.711mm (28.00mil)" at 137.06,86.863 h1.52
  text "PTH" at 171.238,86.863 h1.52
  text "Round" at 184.087,86.863 h1.52
  text "42" at 119.335,83.053 h1.52
  text "1.200mm (47.24mil)" at 137.06,83.053 h1.52
  text "PTH" at 171.238,83.053 h1.52
  text "Round" at 184.087,83.053 h1.52
  text "137 Total" at 119.335,79.243 h1.52

## Text inside footprints (layer, text, board x,y; h text height)
P2: Top Overlay "+" at 87.1,61.7 h1.52 r90; Top Overlay "-" at 87.1,64.2 h1.52 r90
P4: Top Overlay "-" at 85.2,16.4 h1.52; Top Overlay "+" at 82.3,16.4 h1.52
U5: Bottom Overlay "Keypad" at 49.3,64.3 h1.52
U7: Top Overlay "5V" at 2.5,59.5 h1